# EAGLE board Downconverter (EAGLE 9.3.2)
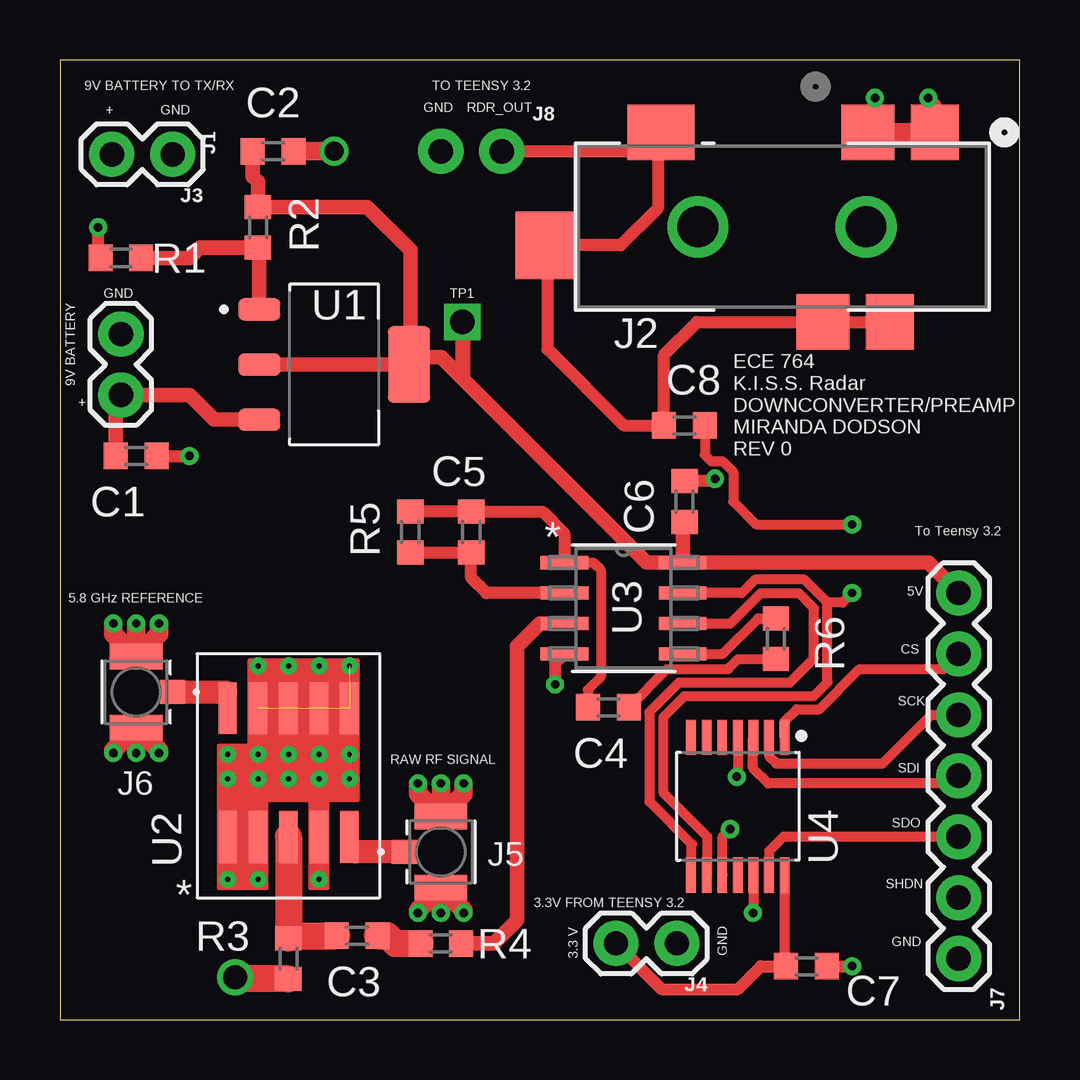
[diagram p0: board, top side]
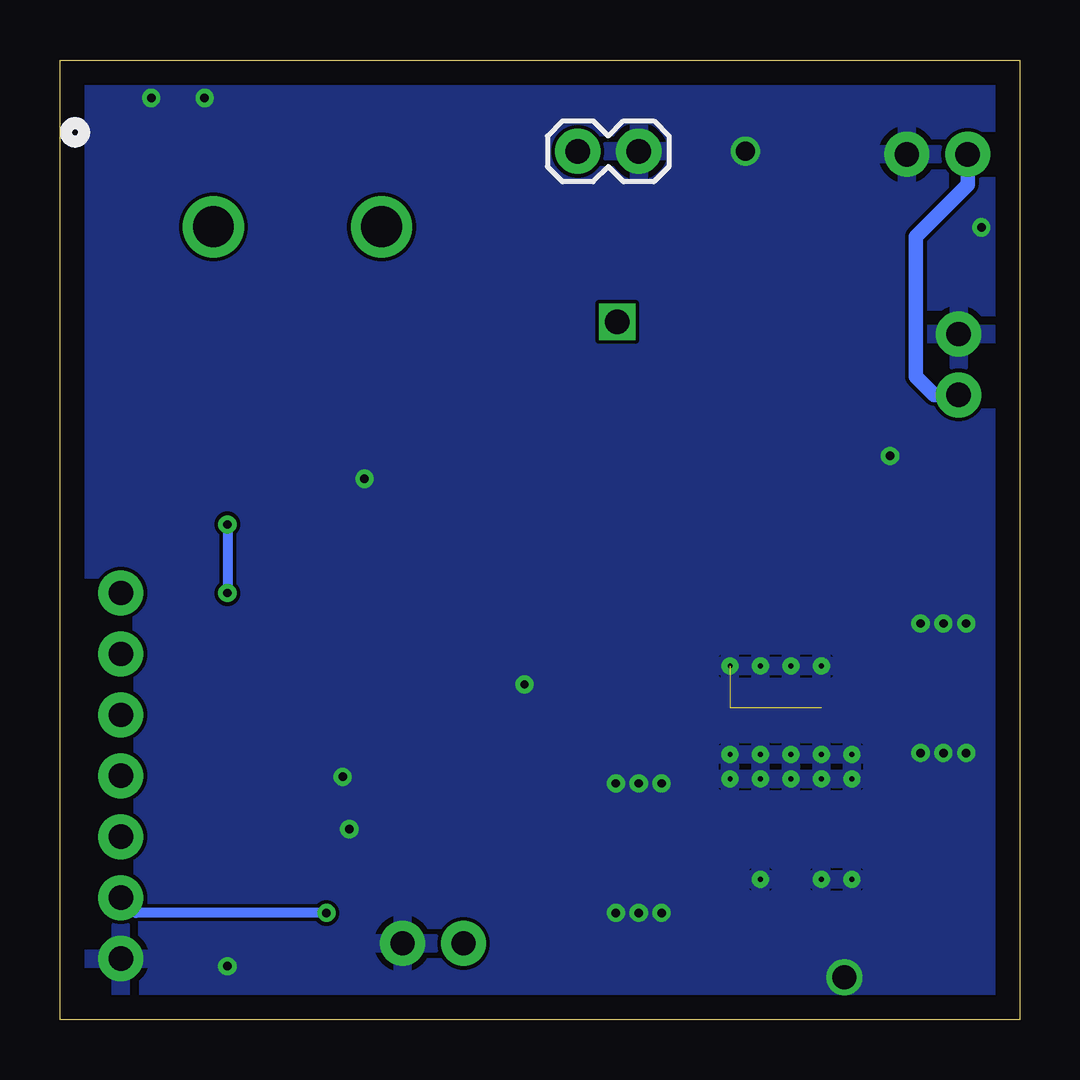
[diagram p1: board, bottom side, seen from below]

Size 40 x 40 mm. Coordinates in mm from the lower left corner, seen from the top.
Outline: 0,0 40,0 40,40 0,40 0,0
Copper layers (1*16): Top 0.035mm / dielectric 1.5mm / Bottom 0.035mm
Design rules "default": minimum track width 6mil, minimum drill 0.35mm, track to track 6mil, track to pad 6mil, pad to pad 6mil, via to via 6mil, smd to smd 6mil, copper to edge 40mil, drill to drill 6mil, minimum pad ring 10mil, minimum via ring 8mil, stop-mask expansion 4mil, vias tented up to drill 0mil, thermal gap 10mil

## Footprints (pad centres in the part's own frame; a part is rotated, then mirrored left to right if it is on the bottom)
R0603 = smd 1 x 1.1: 1 -0.85,0; 2 0.85,0
1X02 = drill 1.016 pad 1.88: 1 0,0; 2 2.54,0
CONN6_SJ-43516-SMT = smd 2.007 x 2.311: 1 -7.772,-7.9; 3 -5.893,0 | smd 2.21 x 2.311: 2 -4.978,-7.9; 4 -3.099,0 | drill 1.702 pad 2.21: 5 -4.902,-3.962; 6 2.108,-3.962 | smd 2.591 x 2.794: 7 8.407,-3.188 | smd 2.794 x 2.311: 8 3.655,-7.9
U.FL = smd 1.05 x 1: 1 -1.525,0 | smd 2.2 x 1.05: 2 0,1.475; 3 0,-1.475
1X07 = drill 1.016 pad 1.88: 1 0,0; 2 2.54,0; 3 5.08,0; 4 7.62,0; 5 10.16,0; 6 12.7,0; 7 15.24,0
5V_REG = smd 0.93 x 1.76: 1 -2.3,-3.125; 2 0,-3.125; 3 2.3,-3.125 | smd 3.19 x 1.76: 4 0,3.125
MIXER = smd 0.76 x 2.16: 1 0,0; 2 1.27,0; 3 2.54,0; 4 3.81,0; 5 5.08,0; 6 5.08,5.36; 7 3.81,5.36; 8 2.54,5.36; 9 1.27,5.36; 10 0,5.36 | drill 0.203 pad 0.61: P$1 0,-1.778; P$2 1.27,-1.778; P$3 3.81,-1.778; P$4 0,2.413; P$5 0,3.429; P$6 1.27,2.413; P$7 1.27,3.429; P$8 2.54,3.429; P$9 2.54,2.413; P$10 3.81,3.429; P$11 3.81,2.413; P$12 5.08,3.429; P$13 5.08,2.413; P$14 1.27,7.112; P$15 2.54,7.112; P$16 3.81,7.112; P$17 5.08,7.112
M08A = smd 1.981 x 0.559: 1 -2.464,1.905; 2 -2.464,0.635; 3 -2.464,-0.635; 4 -2.464,-1.905; 5 2.464,-1.905; 6 2.464,-0.635; 7 2.464,0.635; 8 2.464,1.905
DIGITAL_POT = smd 1.469 x 0.407: 1 -2.871,1.95; 2 -2.871,1.3; 3 -2.871,0.65; 4 -2.871,0; 5 -2.871,-0.65; 6 -2.871,-1.3; 7 -2.871,-1.95; 8 2.871,-1.95; 9 2.871,-1.3; 10 2.871,-0.65; 11 2.871,0; 12 2.871,0.65; 13 2.871,1.3; 14 2.871,1.95

## Placement (x,y rotation side)
C1  10uF  [R0603]  3.17,23.5 0 top
C2  100uF  [R0603]  8.89,36.2 0 top
C3  1uF  [R0603]  12.38,3.49 0 top
C4  1uF  [R0603]  22.86,13.02 0 top
C5  330pF  [R0603]  17.14,20.32 90 top
C6  0.1uF  [R0603]  26.04,21.59 90 top
C7  0.1uF  [R0603]  31.11,2.22 0 top
C8  1uF  [R0603]  26.04,24.77 180 top
J1  [1X02]  2.54,28.57 270 top
J2  3.5HEADPHONEJACK  [CONN6_SJ-43516-SMT]  28.7,29.08 180 top
J3  [1X02]  4.7,36.07 180 top
J4  [1X02]  25.72,3.17 180 top
J5  U.FL_CONN  [U.FL]  15.88,6.99 0 top
J6  U.FL_CONN  [U.FL]  3.17,13.65 180 top
J7  [1X07]  37.47,2.54 90 top
J8  [1X02]  18.41,36.2 0 bottom
R1  330  [R0603]  2.54,31.75 0 top
R2  110  [R0603]  8.26,33.02 90 top
R3  50  [R0603]  9.53,2.54 90 top
R4  1k  [R0603]  15.88,3.17 180 top
R5  100k  [R0603]  14.61,20.32 270 top
R6  1k  [R0603]  29.84,15.88 270 top
U1  5V_REG  [5V_REG]  11.43,27.3 270 top
U2  MIXER  [MIXER]  6.99,7.62 0 top
U3  DUAL_OP_AMP_LMV822  [M08A]  23.5,17.14 0 top
U4  DIGITAL_POTDIGITAL_POT  [DIGITAL_POT]  28.26,8.89 270 top

## Library data of the parts
C1-C8 J2 R1-R6 U1-U4 = 764Library
J1 J3 J4 J7 J8 = SparkFun-Connectors
J5 J6 = 764Library; AVAILABILITY: Unavailable; DESCRIPTION: U.FL Series 50 Ohm Receptacle Male Pins Ultra Small SMT Coaxial Connector; MF: Hirose; MP: U.FL-R-SMT_10_; PACKAGE: FakePackage u; PRICE: None

## Nets
3.3V: C7.1 J4.2 U4.14
5.8GHZ: J6.1 U2.10
5V: C2.1 C6.1 J7.7 R2.2 U1.2 U1.4 U3.8
9V: C1.1 J1.2 J3.2 U1.3
CS: J7.6 U4.1
GND: C1.2 C2.2 C6.2 C7.2 J1.1 J2.1 J2.2 J3.1 J4.1 J5.2 J5.3 J6.2 J6.3 J7.1 J8.2 R1.1 R3.1 U2.1 U2.2 U2.4 U2.6 U2.7 U2.8 U2.9 U2.P$1 U2.P$2 U2.P$3 U2.P$4 U2.P$5 U2.P$6 U2.P$7 U2.P$8 U2.P$9 U2.P$10 U2.P$11 U2.P$12 U2.P$13 U2.P$14 U2.P$15 U2.P$16 U2.P$17 U3.4 U4.4 U4.10
N$1: R1.2 R2.1 U1.1
N$2: C3.1 R3.2 U2.3
N$3: C3.2 R4.2
N$4: R4.1 U3.3
N$5: C5.1 R5.2 U3.2
N$6: C4.1 C5.2 R5.1 U3.1
N$7: C4.2 R6.2
N$8: R6.1 U3.5
N$12: C8.1 U3.7 U4.9
N$13: U3.6 U4.8
RAW_RF: J5.1 U2.5
RDR_OUT: C8.2 J2.3 J2.4 J2.7 J2.8 J8.1
SCK: J7.5 U4.2
SDI: J7.4 U4.3
SDO: J7.3 U4.13
SHDN: J7.2 U4.12

## Tracks (layer width: path | path; a pad name or v marks a point on that pad's centre or on a via)
3.3V
  Top 0.406: U4.14 30.21,2.28 C7.1
  Top 0.508: 23.5,2.86 J4.2 25.08,1.27 28.26,1.27 29.21,2.22 C7.1
5.8GHZ
  Top 0.762: 6.92,13.65 6.99,13.59 U2.10
  Top 0.965: J6.1 6.92,13.65
5V  (via drill 1.02)
  Top 0.406: 16.8,29.05 v16.76,29.08
  Top 0.61: C2.1 8.04,35.14 8.26,34.92 R2.2 12.8,33.87 14.61,32.07 14.61,27.36 U1.4 | U3.8 24.45,19.05 16.8,26.7 15.88,27.62 14.87,27.62 U1.4 | C6.1 25.96,20.66 U3.8 | J7.7 36.2,19.05 U3.8 | U1.2 U1.4
  Top 0.635: 16.8,26.7 16.8,29.05
9V
  Top 0.61: U1.3 6.43,25 5.4,26.04 J1.2 2.33,25.82 C1.1
  Bottom 0.61: J3.2 2.16,34.8 4.32,32.64 4.32,26.8 3.56,26.04 J1.2
CS
  Top 0.406: U4.1 30.21,12.43 30.71,12.93 31.65,12.93 33.33,14.61 36.83,14.61 J7.6
GND  (via drill 0.35, 0.8, 1)  (4 unrouted)
  Top 0.406: U4.4 28.26,10.16 v28.21,10.12 | U4.10 27.62,6.03 27.62,7.62 v27.94,7.94
  Top 0.508: C7.2 v33.02,2.22 | R1.1 1.59,31.85 v1.59,33.02 | C1.2 v5.4,23.5 | v27.3,22.54 27.2,22.44 C6.2 | U3.4 20.64,14.85 v20.64,13.97 | J2.2 33.97,37.27 v33.97,38.42 | 36.32,37.13 J2.1 36.47,38.14 v36.2,38.42
  Top 0.61: U2.1 U2.P$1 | U2.2 U2.P$2 | U2.4 U2.P$3
  Top 0.762: J6.2 3.29,12.06 | J5.2 15.99,8.57 | J6.3 v3.17,16.51 | J6.2 v3.17,11.11 | J6.2 3.06,12.06 | J6.3 4.13,16.08 v4.13,16.51 | J6.3 2.22,16.08 v2.22,16.51 | J6.2 4.13,11.22 v4.13,11.11 | J6.2 2.22,11.22 v2.22,11.11 | J5.3 v15.88,4.45 | J5.3 16.83,4.56 v16.83,4.45 | J5.3 15.67,5.51 | J5.2 v15.88,9.84 | J5.2 16.83,9.41 v16.83,9.84 | J5.2 14.92,9.41 v14.92,9.84 | J2.2 J2.1 36.64,37.15 | C2.2 v11.43,36.2 | J5.3 14.92,4.56 v14.92,4.45
  Top 1.118: R3.1 7.38,1.69 v7.3,1.77
  pour Bottom: -1.27,42.23 -1.27,-1.59 41.59,-1.59 41.59,42.23
N$1
  Top 0.61: R1.2 5.4,31.75 5.82,32.17 R2.1 8.3,32.12 U1.1
N$2
  Top 1.118: U2.3 R3.2 9.63,3.49 C3.1
N$3
  Top 1.118: C3.2 13.65,3.49 13.97,3.17 R4.2
N$4
  Top 0.61: R4.1 18.1,3.17 19.05,4.13 19.05,15.56 20,16.51 U3.3
N$5
  Top 0.508: U3.2 17.78,17.78 17.14,18.41 C5.1 R5.2
N$6
  Top 0.406: U3.1 22.23,19.05 22.54,18.73 22.54,14.29 22.01,13.76 C4.1
  Top 0.508: U3.1 21.03,20.24 20.11,21.17 C5.2 R5.1
N$7
  Top 0.406: C4.2 25.3,14.61 27.85,14.61 28.27,15.03 R6.2
  Top 0.508: 29.63,15.03 R6.2
N$8
  Top 0.406: U3.5 27.62,15.24 29.11,16.73 29.74,16.73
  Top 0.61: 29.74,16.73 R6.1
N$12  (via drill 0.35)
  Top 0.406: U4.9 26.99,6.05 26.99,7.62 25.16,9.45 25.16,12.62 26.02,13.49 31.42,13.49 31.99,14.06 31.99,17.38 | 31.99,17.38 31.03,18.34 28.98,18.34 28.42,17.78 U3.7 | v33.02,17.78 32.62,17.38 31.99,17.38 | C8.1 26.89,23.53 27.14,23.28 27.61,23.28 28.07,22.82 28.07,21.59 29.02,20.64 v33.02,20.64
  Bottom 0.406: v33.02,20.64 v33.02,17.78
N$13
  Top 0.406: U3.6 27.94,16.51 29.21,17.78 30.8,17.78 31.43,17.14 31.43,15.06 30.42,14.05 25.79,14.05 24.57,12.82 24.57,9.09 26.35,7.3 26.31,7.26 U4.8
RAW_RF
  Top 0.762: 12.32,6.99 12.06,7.24 U2.5
  Top 0.965: J5.1 12.32,6.99
RDR_OUT
  Top 0.508: J2.3 J2.4 26.54,29.08 25.18,27.73 C8.2 23.5,24.77 20.32,27.94 20.32,32.25 J2.7 23.38,32.27 24.92,33.81 24.92,36.2 | J2.8 25.05,36.2 24.92,36.2 | J8.1 24.92,36.2
SCK
  Top 0.406: U4.2 29.56,10.97 29.86,10.67 34.29,10.67 36.32,12.7 J7.5
SDI
  Top 0.406: J7.4 37.15,9.84 29.53,9.84 28.89,10.48 28.89,11.75 U4.3
SDO
  Top 0.406: J7.3 30.16,7.62 29.56,7.01 U4.13
SHDN  (via drill 0.35)
  Top 0.406: U4.12 28.91,4.46 v28.89,4.45
  Bottom 0.406: J7.2 36.83,4.45 v28.89,4.45

## Text on the board
tPlace: 9V BATTERY TO TX/RX | TO TEENSY 3.2 | + | GND | GND | RDR_OUT | GND | TP1 | 9V BATTERY | + | ECE 764 / K.I.S.S. Radar / DOWNCONVERTER/PREAMP / MIRANDA DODSON / REV 0 | To Teensy 3.2 | 5.8 GHz REFERENCE | 5V | CS | SCK | RAW RF SIGNAL | SDI | SDO | 3.3V FROM TEENSY 3.2 | SHDN | 3.3 V | GND | GND